# Altium PCB PCB1.PcbDoc
Units mm, origin at the board's own origin, x right, y up, seen from the top; angles counter-clockwise.
Board outline 61.89 x 16.99 mm, 2 copper layers (Top Layer, Bottom Layer); 28 components, 3 nets, 112 pads, 14 vias.
Unrouted connection lines stored in the file: 18.
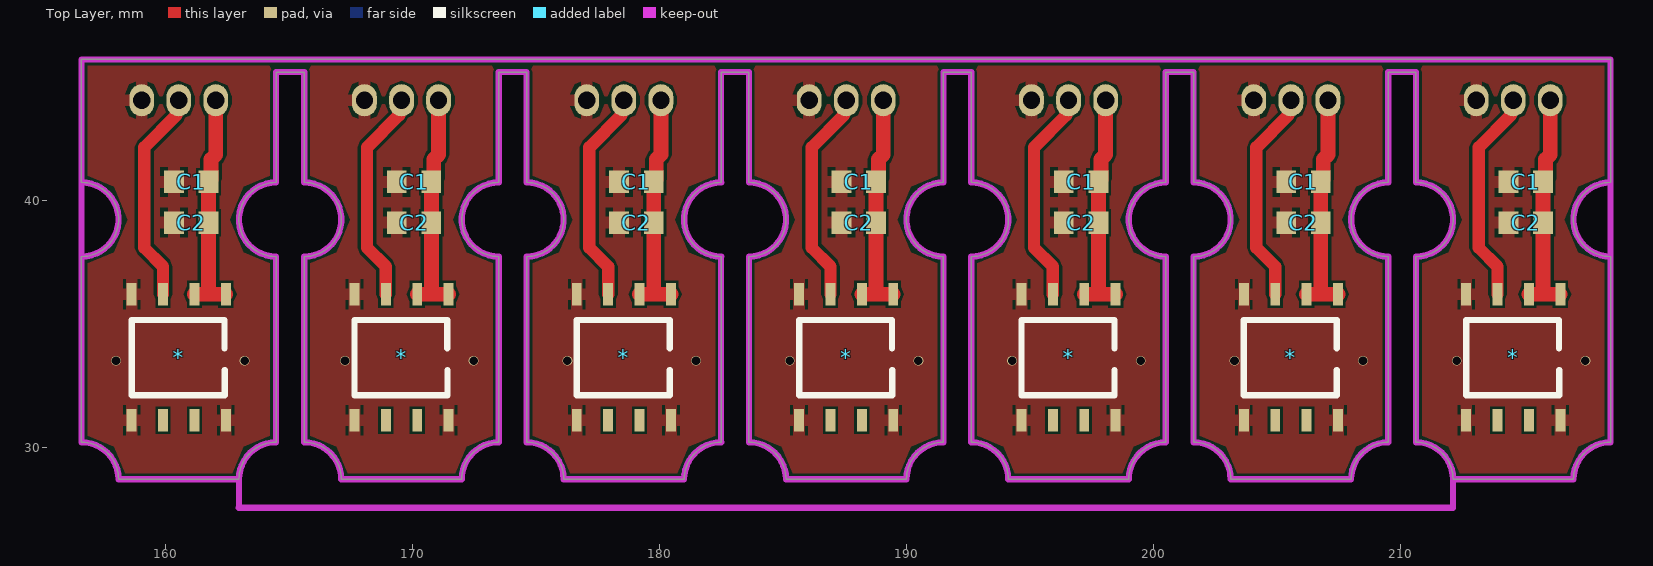
[diagram p0: Top Layer view]
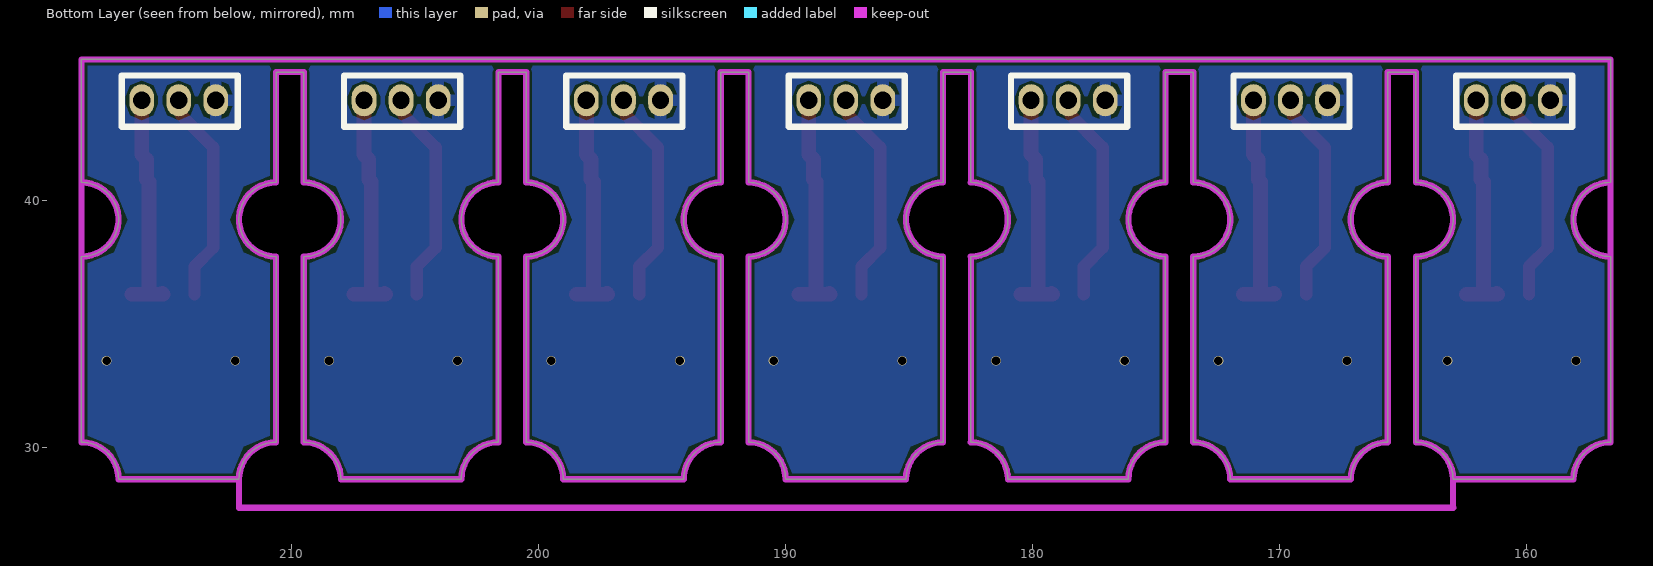
[diagram p1: Bottom Layer view, seen from below]
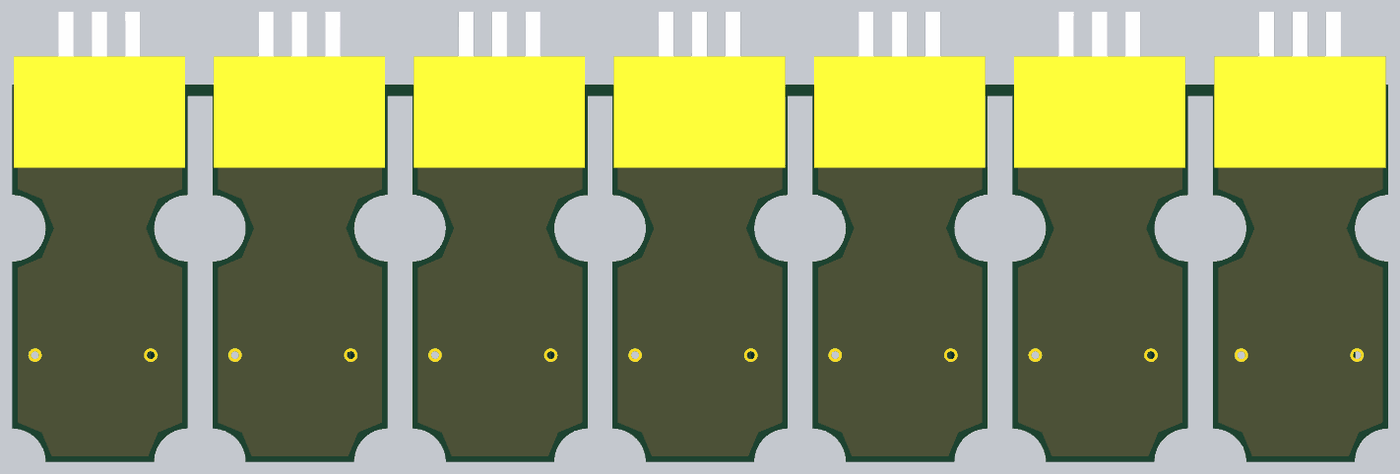
[diagram p2: 3D render of the assembled board from below, using the file's embedded part models]

## Layer stack, top to bottom
Top Solder: solder mask 0.0102, Solder Resist, Dk 3.5
Top Layer: signal copper 0.0356
Dielectric 1: dielectric 0.32, FR-4, Dk 4.8
Bottom Layer: signal copper 0.0356
Bottom Solder: solder mask 0.0102, Solder Resist, Dk 3.5

## Board outline
156.591,30.226 cw(c156.591,28.726) 158.091,28.726 162.965,28.726 cw(c164.465,28.726) 164.465,30.226 164.465,37.743 cw(c164.465,39.243) 164.465,40.743 164.465,45.212 165.608,45.212 165.608,40.743 cw(c165.608,39.243) 165.608,37.743 165.608,30.226 cw(c165.608,28.726) 167.108,28.726 171.982,28.726 cw(c173.482,28.726) 173.482,30.226 173.482,37.743 cw(c173.482,39.243) 173.482,40.743 173.482,45.212 174.608,45.212 174.608,40.743 cw(c174.608,39.243) 174.608,37.743 174.608,30.226 cw(c174.608,28.726) 176.108,28.726 180.982,28.726 cw(c182.482,28.726) 182.482,30.226 182.482,37.743 cw(c182.482,39.243) 182.482,40.743 182.482,45.212 183.608,45.212 183.608,40.743 cw(c183.608,39.243) 183.608,37.743 183.608,30.226 cw(c183.608,28.726) 185.108,28.726 189.982,28.726 cw(c191.482,28.726) 191.482,30.226 191.482,37.743 cw(c191.482,39.243) 191.482,40.743 191.482,45.212 192.608,45.212 192.608,40.743 cw(c192.608,39.243) 192.608,37.743 192.608,30.226 cw(c192.608,28.726) 194.108,28.726 198.982,28.726 cw(c200.482,28.726) 200.482,30.226 200.482,37.743 cw(c200.482,39.243) 200.482,40.743 200.482,45.212 201.608,45.212 201.608,40.743 cw(c201.608,39.243) 201.608,37.743 201.608,30.226 cw(c201.608,28.726) 203.108,28.726 207.982,28.726 cw(c209.482,28.726) 209.482,30.226 209.482,37.743 cw(c209.482,39.243) 209.482,40.743 209.482,45.212 210.608,45.212 210.608,40.743 cw(c210.608,39.243) 210.608,37.743 210.608,30.226 cw(c210.608,28.726) 212.108,28.726 216.982,28.726 cw(c218.482,28.726) 218.482,30.226 218.482,37.743 cw(c218.482,39.243) 218.482,40.743 218.482,45.72 156.591,45.72 156.591,40.743 cw(c156.591,39.243) 156.591,37.743

## Design rules (kind name [scope] priority, off if disabled: settings)
Clearance [All] p1: gap=0.1 ignorepadtopadclearanceinfootprint=TRUE except(0: Arc-Hole Track-Hole SMDPad-Hole THPad-Hole Via-Hole Fill-Hole Poly-Hole Region-Hole Text-Hole)
DiffPairsRouting [All] p1: maxlimit=0.6 minlimit=0.3 mostfreqgap=0.5 toplayer_minwidth=0.3 toplayer_maxwidth=0.6 toplayer_prefwidth=0.5 bottomlayer_minwidth=0.3 bottomlayer_maxwidth=0.6 bottomlayer_prefwidth=0.5 maxuncoupledlength=15
HoleSize [All] p1: absolutevalues=TRUE maxlimit=10 minlimit=0.3 maxpercent=80.000 minpercent=20.000
PlaneClearance [All] p1: clearance=0.2
PlaneConnect [All] p1: planeconnectstyle=Relief reliefexpansion=0.5 reliefentries=4 reliefconductorwidth=0.5 reliefairgap=0.15
PolygonConnect [All] p1: connectstyle=Relief reliefconductorwidth=0.5 reliefentries=4 polygonreliefangle="90 Angle" airgapwidth=0.15
RoomDefinition Sheet1 [InComponentClass('Sheet1')] p1: confinementstyle=ConfineIn formatcopy=TRUE lockcomponents=FALSE outline 153.204,50.546 222.25,50.546 222.25,25.527 152.527,25.527
RoutingCorners [All] p1: cornerstyle=45-Degree minsetback=0 maxsetback=5
RoutingVias [All] p1: holewidth=0.3 width=1.27 viastyle="Through Hole" minholewidth=0.3 minwidth=0.3 maxholewidth=5 maxwidth=10
SilkToSolderMaskClearance [IsPad] p1: minsilkscreentomaskgap=0.1 clearancetoexposedcopper=TRUE
SolderMaskExpansion [All] p1: expansion=0.102 istentingtop=FALSE
Width [All] p1: maxlimit=10 minlimit=0.3 preferedwidth=0.3
24 further rules are at their usual default settings.

## Components (designator, comment, footprint, x,y, rotation, side; value= is the part's Value field where it differs from the comment)
* "AS5600" SOP8 214.545,33.655 r270 top
* "AS5600" SOP8 205.545,33.655 r270 top
* "AS5600" SOP8 196.545,33.655 r270 top
* "AS5600" SOP8 187.545,33.655 r270 top
* "AS5600" SOP8 178.545,33.655 r270 top
* "AS5600" SOP8 169.545,33.655 r270 top
* "AS5600" SOP8 160.528,33.655 r270 top
C1 "Cap Semi" 1608[0603] 215.053,40.767 r0 top value=100nF
C1 "Cap Semi" 1608[0603] 206.053,40.767 r0 top value=100nF
C1 "Cap Semi" 1608[0603] 197.053,40.767 r0 top value=100nF
C1 "Cap Semi" 1608[0603] 188.053,40.767 r0 top value=100nF
C1 "Cap Semi" 1608[0603] 179.053,40.767 r0 top value=100nF
C1 "Cap Semi" 1608[0603] 170.053,40.767 r0 top value=100nF
C1 "Cap Semi" 1608[0603] 161.036,40.767 r0 top value=100nF
C2 "Cap Semi" 1608[0603] 215.053,39.116 r0 top value=1uF
C2 "Cap Semi" 1608[0603] 206.053,39.116 r0 top value=1uF
C2 "Cap Semi" 1608[0603] 197.053,39.116 r0 top value=1uF
C2 "Cap Semi" 1608[0603] 188.053,39.116 r0 top value=1uF
C2 "Cap Semi" 1608[0603] 179.053,39.116 r0 top value=1uF
C2 "Cap Semi" 1608[0603] 170.053,39.116 r0 top value=1uF
C2 "Cap Semi" 1608[0603] 161.036,39.116 r0 top value=1uF
? "SH1.0_3P" SH1_3P 214.569,43.18 r270 bottom
? "SH1.0_3P" SH1_3P 205.569,43.18 r270 bottom
? "SH1.0_3P" SH1_3P 196.569,43.18 r270 bottom
? "SH1.0_3P" SH1_3P 187.569,43.18 r270 bottom
? "SH1.0_3P" SH1_3P 178.569,43.18 r270 bottom
? "SH1.0_3P" SH1_3P 169.569,43.18 r270 bottom
? "SH1.0_3P" SH1_3P 160.552,43.18 r270 bottom

## Footprints (in the part's own frame and the unit in brackets; to place one, negate y for a bottom-side part, rotate by r counter-clockwise, add the part's x,y. Pads: shape width x height; smd on the part's side, far side on the other; paste and mask are expansions set on the pad)
1608[0603] [mm] "Chip Capacitor, Body 1.6x0.8mm, IPC High Density"
  rect 0.8x0.9 smd: 1(-0.7,0) 2(0.7,0)
  body extent -0.87,-0.48 0.87,0.48, height 1.3
SH1_3P [mm]
  oval 1.3x1 hole 0.7: 1(-0.889,1.524) 2(-0.889,0.024) 3(-0.889,-1.476)
  silkscreen extent -1.89,-2.29 0.19,2.41, body extent -5.82,-3.85 1.2,3.85, height 3.5
SOP8 [mm]
  rect 0.9x0.4 smd: 1(-2.56,1.905) 2(-2.56,0.635) 3(-2.56,-0.635) 4(-2.56,-1.905) 5(2.54,-1.905) 5(2.54,-1.905) 6(2.54,-0.635) 7(2.54,0.635) 8(2.54,1.905)
  silkscreen extent -1.52,-1.91 1.52,1.86, body extent -2.75,-2.45 2.75,2.45, height 1.75

## Part data
C1 C1 C1 C1 C1 C1 C1 C2 C2 C2 C2 C2 C2 C2: "Capacitor (Semiconductor SIM Model)", LatestRevisionDate=29-May-2009, LatestRevisionNote="IPC-7351 Footprint Added.", PackageDescription="Chip Capacitor", PackageReference=C1206, Published=8-Jun-2000, Publisher="Altium Limited"

## Via types
v1: diameter 0.4, hole 0.35, Top Layer to Bottom Layer, 14 vias

## Nets (pads, with @x,y where several pads share a name; then routed paths per layer and width w, separated by ;. In a path a pad name is that pad's centre, name@x,y a point inside that pad or via, vN(x,y) a via of type N, cw(c..) or ccw(c..) an arc to the next point about the centre after c; other vN are vias at no path point)
3V3: *.1 *.2 ?.3 C1.2 C2.2 | length 65.2
  Top Layer w0.6: *.2@161.196,36.248 161.163,36.215 161.671,36.215 ; ?.3@162.028,44.069 162.028,41.871 161.836,41.679 161.836,40.867 161.736,40.767 161.736,39.116 161.736,36.28 161.671,36.215 ; *.1@162.433,36.215 161.671,36.215 ; *.2@170.213,36.248 170.18,36.215 170.688,36.215 ; ?.3@171.045,44.069 171.045,41.871 170.853,41.679 170.853,40.867 170.753,40.767 170.753,39.116 170.753,36.28 170.688,36.215 ; *.1@171.45,36.215 170.688,36.215 ; *.2@179.213,36.248 179.18,36.215 179.688,36.215 ; ?.3@180.045,44.069 180.045,41.871 179.853,41.679 179.853,40.867 179.753,40.767 179.753,39.116 179.753,36.28 179.688,36.215 ; *.1@180.45,36.215 179.688,36.215 ; *.2@188.213,36.248 188.18,36.215 188.688,36.215 ; ?.3@189.045,44.069 189.045,41.871 188.853,41.679 188.853,40.867 188.753,40.767 188.753,39.116 188.753,36.28 188.688,36.215 ; *.1@189.45,36.215 188.688,36.215 ; *.2@197.213,36.248 197.18,36.215 197.688,36.215 ; ?.3@198.045,44.069 198.045,41.871 197.853,41.679 197.853,40.867 197.753,40.767 197.753,39.116 197.753,36.28 197.688,36.215 ; *.1@198.45,36.215 197.688,36.215 ; *.2@206.213,36.248 206.18,36.215 206.688,36.215 ; ?.3@207.045,44.069 207.045,41.871 206.853,41.679 206.853,40.867 206.753,40.767 206.753,39.116 206.753,36.28 206.688,36.215 ; *.1@207.45,36.215 206.688,36.215 ; *.2@215.213,36.248 215.18,36.215 215.688,36.215 ; ?.3@216.045,44.069 216.045,41.871 215.853,41.679 215.853,40.867 215.753,40.767 215.753,39.116 215.753,36.28 215.688,36.215 ; *.1@216.45,36.215 215.688,36.215
GND: *.4 *.5 *.8 ?.1 C1.1 C2.1
  other v1: 157.988,33.528 163.195,33.528 167.259,33.528 172.466,33.528 176.259,33.528 181.466,33.528 185.259,33.528 190.466,33.528 194.259,33.528 199.466,33.528 203.259,33.528 208.466,33.528 212.259,33.528 217.466,33.528
OUT: *.3 ?.2 | length 61.2
  Top Layer w0.5: *.3@159.893,36.215 159.893,37.338 159.131,38.1 159.131,42.164 160.432,43.465 160.432,43.973 ?.2@160.528,44.069 ; *.3@168.91,36.215 168.91,37.338 168.148,38.1 168.148,42.164 169.449,43.465 169.449,43.973 ?.2@169.545,44.069 ; *.3@177.91,36.215 177.91,37.338 177.148,38.1 177.148,42.164 178.449,43.465 178.449,43.973 ?.2@178.545,44.069 ; *.3@186.91,36.215 186.91,37.338 186.148,38.1 186.148,42.164 187.449,43.465 187.449,43.973 ?.2@187.545,44.069 ; *.3@195.91,36.215 195.91,37.338 195.148,38.1 195.148,42.164 196.449,43.465 196.449,43.973 ?.2@196.545,44.069 ; *.3@204.91,36.215 204.91,37.338 204.148,38.1 204.148,42.164 205.449,43.465 205.449,43.973 ?.2@205.545,44.069 ; *.3@213.91,36.215 213.91,37.338 213.148,38.1 213.148,42.164 214.449,43.465 214.449,43.973 ?.2@214.545,44.069
pads on no net: *.6 *.7

## Polygon pours and split planes (outlines as drawn)
GND on Bottom Layer "GND_L02_P025" (solid, pour order 25): 218.482,28.726 156.948,28.726 156.591,29.083 156.591,45.72 218.482,45.72
GND on Bottom Layer "GND_L02_P004" (solid, pour order 4): 166.497,38.735
GND on Bottom Layer "GND_L02_P003" (solid, pour order 3): 166.878,38.989
GND on Bottom Layer "GND_L02_P001" (solid, pour order 1): 164.465,43.942
GND on Top Layer "GND_L01_P022" (solid, pour order 22): 156.591,45.72 156.591,28.726 218.482,28.726 218.482,45.72

## Keep-outs
Keep-Out Layer:
  pour cut-out: 218.482,37.743 cw(c218.482,39.243) 218.482,40.743
  pour cut-out: 156.591,37.743 ccw(c156.591,39.243) 156.591,40.743
  pour cut-out: 162.959,27.577 162.965,27.583 162.965,28.726 cw(c164.465,28.726) 164.465,30.226 164.465,37.743 cw(c164.465,39.243) 164.465,40.743 164.465,45.212 165.608,45.212 165.608,40.743 cw(c165.608,39.243) 165.608,37.743 165.608,30.226 cw(c165.608,28.726) 167.108,28.726 171.982,28.726 cw(c173.482,28.726) 173.482,30.226 173.482,37.743 cw(c173.482,39.243) 173.482,40.743 173.482,45.212 174.608,45.212 174.608,40.743 cw(c174.608,39.243) 174.608,37.743 174.608,30.226 cw(c174.608,28.726) 176.108,28.726 180.982,28.726 cw(c182.482,28.726) 182.482,30.226 182.482,37.743 cw(c182.482,39.243) 182.482,40.743 182.482,45.212 183.608,45.212 183.608,40.743 cw(c183.608,39.243) 183.608,37.743 183.608,30.226 cw(c183.608,28.726) 185.108,28.726 189.982,28.726 cw(c191.482,28.726) 191.482,30.226 191.482,37.743 cw(c191.482,39.243) 191.482,40.743 191.482,45.212 192.608,45.212 192.608,40.743 cw(c192.608,39.243) 192.608,37.743 192.608,30.226 cw(c192.608,28.726) 194.108,28.726 198.982,28.726 cw(c200.482,28.726) 200.482,30.226 200.482,37.743 cw(c200.482,39.243) 200.482,40.743 200.482,45.212 201.608,45.212 201.608,40.743 cw(c201.608,39.243) 201.608,37.743 201.608,30.226 cw(c201.608,28.726) 203.108,28.726 207.982,28.726 cw(c209.482,28.726) 209.482,30.226 209.482,37.743 cw(c209.482,39.243) 209.482,40.743 209.482,45.212 210.608,45.212 210.608,40.743 cw(c210.608,39.243) 210.608,37.743 210.608,30.226 cw(c210.608,28.726) 212.108,28.726 212.108,27.577
  lines w0.25: 156.591,30.226 156.591,37.743 156.591,40.743 156.591,45.72 218.482,45.72 218.482,40.743 218.482,37.743 218.482,30.226 ; 158.091,28.726 160.911,28.726 162.965,28.726 162.965,27.583 162.959,27.577 212.108,27.577 212.108,28.726 214.928,28.726 216.982,28.726 ; 164.465,30.226 164.465,37.743 ; 164.465,40.743 164.465,45.212 165.608,45.212 165.608,40.743 ; 165.608,30.226 165.608,37.743 ; 167.108,28.726 169.928,28.726 171.982,28.726 ; 173.482,30.226 173.482,37.743 ; 173.482,40.743 173.482,45.212 174.608,45.212 174.608,40.743 ; 174.608,30.226 174.608,37.743 ; 176.108,28.726 178.928,28.726 180.982,28.726 ; 182.482,30.226 182.482,37.743 ; 182.482,40.743 182.482,45.212 183.608,45.212 183.608,40.743 ; 183.608,30.226 183.608,37.743 ; 185.108,28.726 187.928,28.726 189.982,28.726 ; 191.482,30.226 191.482,37.743 ; 191.482,40.743 191.482,45.212 192.608,45.212 192.608,40.743 ; 192.608,30.226 192.608,37.743 ; 194.108,28.726 196.928,28.726 198.982,28.726 ; 200.482,30.226 200.482,37.743 ; 200.482,40.743 200.482,45.212 201.608,45.212 201.608,40.743 ; 201.608,30.226 201.608,37.743 ; 203.108,28.726 205.928,28.726 207.982,28.726 ; 209.482,30.226 209.482,37.743 ; 209.482,40.743 209.482,45.212 210.608,45.212 210.608,40.743 ; 210.608,30.226 210.608,37.743
  lines w0.254: 156.591,30.226 cw(c156.591,28.726) 158.091,28.726 ; 156.591,37.743 ccw(c156.591,39.243) 156.591,40.743 ; 162.965,28.726 cw(c164.465,28.726) 164.465,30.226 ; 164.465,37.743 cw(c164.465,39.243) 164.465,40.743 ; 165.608,30.226 cw(c165.608,28.726) 167.108,28.726 ; 165.608,37.743 ccw(c165.608,39.243) 165.608,40.743 ; 171.982,28.726 cw(c173.482,28.726) 173.482,30.226 ; 173.482,37.743 cw(c173.482,39.243) 173.482,40.743 ; 174.608,30.226 cw(c174.608,28.726) 176.108,28.726 ; 174.608,37.743 ccw(c174.608,39.243) 174.608,40.743 ; 180.982,28.726 cw(c182.482,28.726) 182.482,30.226 ; 182.482,37.743 cw(c182.482,39.243) 182.482,40.743 ; 183.608,30.226 cw(c183.608,28.726) 185.108,28.726 ; 183.608,37.743 ccw(c183.608,39.243) 183.608,40.743 ; 189.982,28.726 cw(c191.482,28.726) 191.482,30.226 ; 191.482,37.743 cw(c191.482,39.243) 191.482,40.743 ; 192.608,30.226 cw(c192.608,28.726) 194.108,28.726 ; 192.608,37.743 ccw(c192.608,39.243) 192.608,40.743 ; 198.982,28.726 cw(c200.482,28.726) 200.482,30.226 ; 200.482,37.743 cw(c200.482,39.243) 200.482,40.743 ; 201.608,30.226 cw(c201.608,28.726) 203.108,28.726 ; 201.608,37.743 ccw(c201.608,39.243) 201.608,40.743 ; 207.982,28.726 cw(c209.482,28.726) 209.482,30.226 ; 209.482,37.743 cw(c209.482,39.243) 209.482,40.743 ; 210.608,30.226 cw(c210.608,28.726) 212.108,28.726 ; 210.608,37.743 ccw(c210.608,39.243) 210.608,40.743 ; 216.982,28.726 cw(c218.482,28.726) 218.482,30.226 ; 218.482,37.743 cw(c218.482,39.243) 218.482,40.743

## Silkscreen, mask and mechanical layers (free items; w line width, h text height)
Mechanical 1:
  lines w0.25: 156.591,30.226 156.591,37.743 ; 156.591,40.743 156.591,45.72 218.482,45.72 218.482,40.743 ; 158.091,28.726 160.911,28.726 162.965,28.726 ; 164.465,30.226 164.465,37.743 ; 164.465,40.743 164.465,45.212 165.608,45.212 165.608,40.743 ; 165.608,30.226 165.608,37.743 ; 167.108,28.726 169.928,28.726 171.982,28.726 ; 173.482,30.226 173.482,37.743 ; 173.482,40.743 173.482,45.212 174.608,45.212 174.608,40.743 ; 174.608,30.226 174.608,37.743 ; 176.108,28.726 178.928,28.726 180.982,28.726 ; 182.482,30.226 182.482,37.743 ; 182.482,40.743 182.482,45.212 183.608,45.212 183.608,40.743 ; 183.608,30.226 183.608,37.743 ; 185.108,28.726 187.928,28.726 189.982,28.726 ; 191.482,30.226 191.482,37.743 ; 191.482,40.743 191.482,45.212 192.608,45.212 192.608,40.743 ; 192.608,30.226 192.608,37.743 ; 194.108,28.726 196.928,28.726 198.982,28.726 ; 200.482,30.226 200.482,37.743 ; 200.482,40.743 200.482,45.212 201.608,45.212 201.608,40.743 ; 201.608,30.226 201.608,37.743 ; 203.108,28.726 205.928,28.726 207.982,28.726 ; 209.482,30.226 209.482,37.743 ; 209.482,40.743 209.482,45.212 210.608,45.212 210.608,40.743 ; 210.608,30.226 210.608,37.743 ; 212.108,28.726 214.928,28.726 216.982,28.726 ; 218.482,30.226 218.482,37.743
  lines w0.254: 156.591,30.226 cw(c156.591,28.726) 158.091,28.726 ; 156.591,37.743 ccw(c156.591,39.243) 156.591,40.743 ; 162.965,28.726 cw(c164.465,28.726) 164.465,30.226 ; 164.465,37.743 cw(c164.465,39.243) 164.465,40.743 ; 165.608,30.226 cw(c165.608,28.726) 167.108,28.726 ; 165.608,37.743 ccw(c165.608,39.243) 165.608,40.743 ; 171.982,28.726 cw(c173.482,28.726) 173.482,30.226 ; 173.482,37.743 cw(c173.482,39.243) 173.482,40.743 ; 174.608,30.226 cw(c174.608,28.726) 176.108,28.726 ; 174.608,37.743 ccw(c174.608,39.243) 174.608,40.743 ; 180.982,28.726 cw(c182.482,28.726) 182.482,30.226 ; 182.482,37.743 cw(c182.482,39.243) 182.482,40.743 ; 183.608,30.226 cw(c183.608,28.726) 185.108,28.726 ; 183.608,37.743 ccw(c183.608,39.243) 183.608,40.743 ; 189.982,28.726 cw(c191.482,28.726) 191.482,30.226 ; 191.482,37.743 cw(c191.482,39.243) 191.482,40.743 ; 192.608,30.226 cw(c192.608,28.726) 194.108,28.726 ; 192.608,37.743 ccw(c192.608,39.243) 192.608,40.743 ; 198.982,28.726 cw(c200.482,28.726) 200.482,30.226 ; 200.482,37.743 cw(c200.482,39.243) 200.482,40.743 ; 201.608,30.226 cw(c201.608,28.726) 203.108,28.726 ; 201.608,37.743 ccw(c201.608,39.243) 201.608,40.743 ; 207.982,28.726 cw(c209.482,28.726) 209.482,30.226 ; 209.482,37.743 cw(c209.482,39.243) 209.482,40.743 ; 210.608,30.226 cw(c210.608,28.726) 212.108,28.726 ; 210.608,37.743 ccw(c210.608,39.243) 210.608,40.743 ; 216.982,28.726 cw(c218.482,28.726) 218.482,30.226 ; 218.482,37.743 cw(c218.482,39.243) 218.482,40.743